# Altium PCB QuadSerial.PcbDoc
Units mil, origin at the board's own origin, x right, y up, seen from the top; angles counter-clockwise.
Board outline 6000 x 4000 mil, 2 copper layers (Top Layer, Bottom Layer); 10 components, 10 nets, 107 pads, 0 vias.
Unrouted connection lines stored in the file: 34.
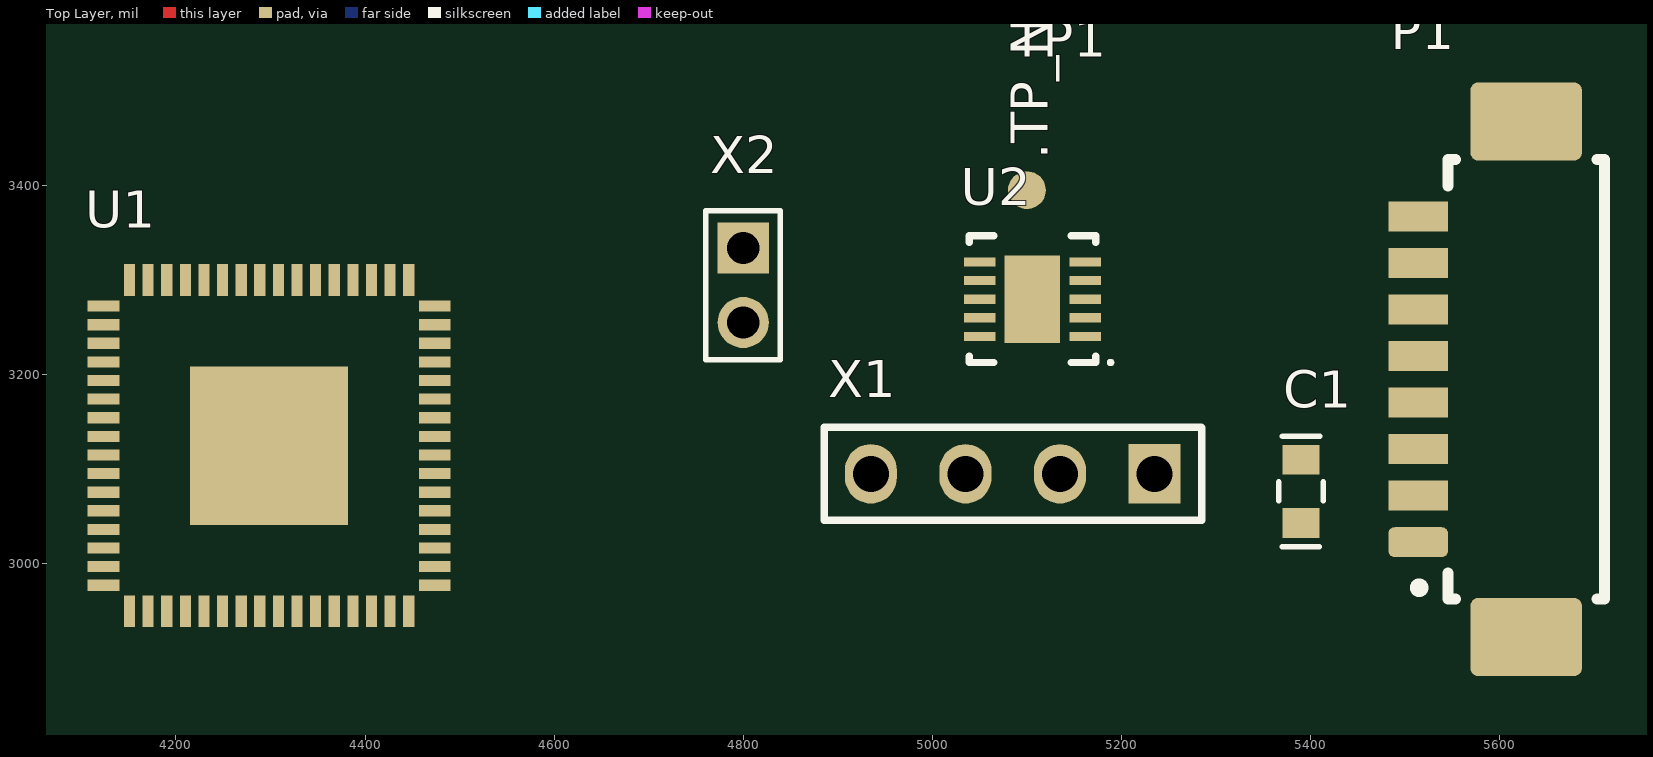
[diagram p0: Top Layer view]
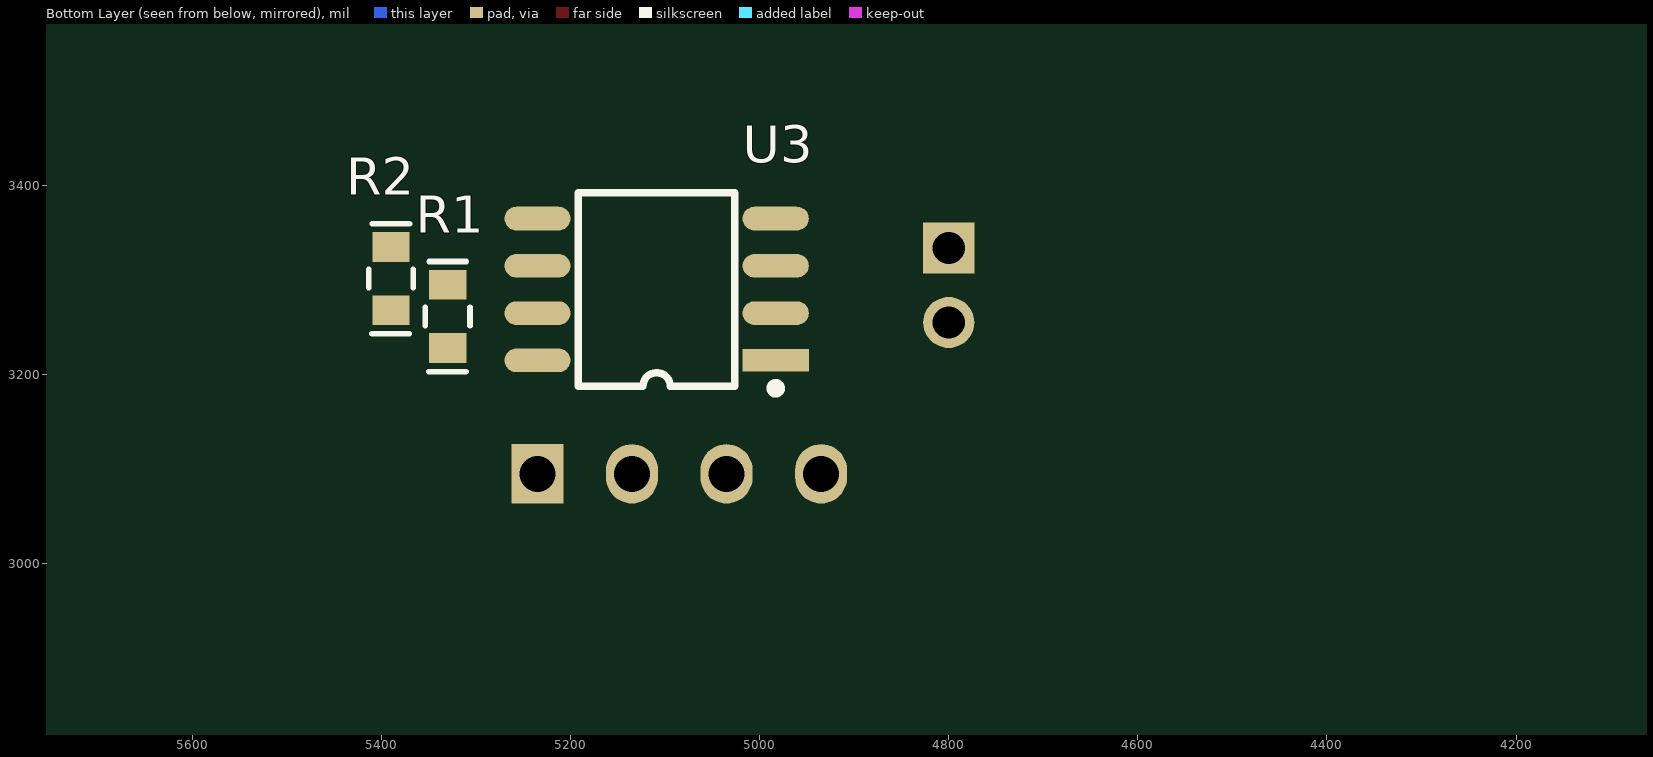
[diagram p1: Bottom Layer view, seen from below]

## Layer stack, top to bottom
Top Solder: solder mask 0.4, Solder Resist, Dk 3.5
Top Layer: signal copper 1.4
Dielectric 1: dielectric 12.6, FR-4, Dk 4.8
Bottom Layer: signal copper 1.4
Bottom Solder: solder mask 0.4, Solder Resist, Dk 3.5

## Board outline
1000,1000 7000,1000 7000,5000 1000,5000

## Design rules (kind name [scope] priority, off if disabled: settings)
Clearance [All] p1: gap=10 ignorepadtopadclearanceinfootprint=FALSE
PolygonConnect [All] p1: connectstyle=Relief reliefconductorwidth=10 reliefentries=4 polygonreliefangle="90 Angle" airgapwidth=10
RoutingVias [All] p1: holewidth=28 width=50 viastyle="Through Hole" minholewidth=28 minwidth=50 maxholewidth=28 maxwidth=50
SolderMaskExpansion [All] p1: expansion=4 istentingtop=FALSE
SupplyNets "Schematic Supply Nets_1" [InNet('GND')] p1: voltage=0.000
SupplyNets "Schematic Supply Nets" [InNet('3v3')] p2: voltage=0.000
Width [All] p1: maxlimit=10 minlimit=10 preferedwidth=10
30 further rules are at their usual default settings.

## Classes and differential pairs
component class IO_driver: C1 P1 R1 R2 TP1 U2 U3 X1 X2
component class main: U1

## Components (designator, comment, footprint, x,y, rotation, side; value= is the part's Value field where it differs from the comment)
C1 "K10-79" SMD_C0603 5390,3043.07 r90 top value=0,1мкФ
P1 "PicoBlade_53261-0871" 53261-0871 5570,3195 r90 top
R1 "OSM R1-8" SMD_0603 5330,3228.07 r90 bottom value=1k
R2 "OSM R1-8" SMD_0603 5390,3268.07 r90 bottom value=1k
TP1 "..." TP_PAD_1 5100,3395 r90 top
U1 "CP2108" QFN64 4298.58,3124.8 r180 top
U2 "ADM3066EBCPZ" LFCSP-10_3x3 5105.91,3279.69 r180 top
U3 "ADM3490ARZ" SOIC-8 4983.03,3215 r0 bottom
X1 "Header 1X4" PLS-4 5235,3095 r180 top
X2 "Header 2X2" PLD2-2 4800,3333.74 r270 top

## Footprints (in the part's own frame and the unit in brackets; to place one, negate y for a bottom-side part, rotate by r counter-clockwise, add the part's x,y. Pads: shape width x height; smd on the part's side, far side on the other; paste and mask are expansions set on the pad)
53261-0871 [mm]
  rrect40% 0.8x1.6 smd: 1(-4.375,1.425)
  rect 0.8x1.6 smd: 2(-3.125,1.425) 3(-1.875,1.425) 4(-0.625,1.425) 5(0.625,1.425) 6(1.875,1.425) 7(3.125,1.425) 8(4.375,1.425)
  rrect20% 2.1x3 smd: MP1(-6.925,-1.475) MP2(6.925,-1.475)
  silkscreen extent -5.9,-3.57 5.9,1.52, body extent -7.55,-3.31 7.6,1.89, height 3.4
LFCSP-10_3x3 [mm] "LFCSP, 10-Leads, Body 3,00x3,00mm, Pitch 0,50mm, Thermal Pad 2,36x1,49mm, IPC Medium Density"
  rect 0.85x0.25 smd mask+0.05: 1(-1.42,1) 2(-1.42,0.5) 3(-1.42,0) 4(-1.42,-0.5) 5(-1.42,-1) 6(1.42,-1) 7(1.42,-0.5) 8(1.42,0) 9(1.42,0.5) 10(1.42,1)
  rect 1.49x2.36 smd mask+0.05: 11(0,0)
  silkscreen extent -2.15,-1.7 1.7,1.75, body extent -1.57,-1.55 1.57,1.55, height 0.8
PLD2-2 [mil]
  rect 54x54 hole 34: 1(0,0)
  round 54 hole 34: 2(78.74,0)
  silkscreen extent -39,-40 118,39, body extent -51,-40 130,39, height 217
PLS-4 [mm] "2.54mm PIN HEADER R/A"
  rect 1.4x1.6 hole 0.97: 1(0,0)
  oval 1.4x1.6 hole 0.97: 2(2.54,0) 3(5.08,0) 4(7.62,0)
  silkscreen extent -1.27,-1.25 8.87,1.25, body extent -1.25,-1.24 8.91,1.3, height 9.3
QFN64 [mm]
  rect 0.85x0.3 smd: 1(-4.45,3.75) 2(-4.45,3.25) 3(-4.45,2.75) 4(-4.45,2.25) 5(-4.45,1.75) 6(-4.45,1.25) 7(-4.45,0.75) 8(-4.45,0.25) 9(-4.45,-0.25) 10(-4.45,-0.75) 11(-4.45,-1.25) 12(-4.45,-1.75) 13(-4.45,-2.25) 14(-4.45,-2.75) 15(-4.45,-3.25) 16(-4.45,-3.75) 33(4.45,-3.75) 34(4.45,-3.25) 35(4.45,-2.75) 36(4.45,-2.25) 37(4.45,-1.75) 38(4.45,-1.25) 39(4.45,-0.75) 40(4.45,-0.25) 41(4.45,0.25) 42(4.45,0.75) 43(4.45,1.25) 44(4.45,1.75) 45(4.45,2.25) 46(4.45,2.75) 47(4.45,3.25) 48(4.45,3.75)
  rect 0.3x0.85 smd: 17(-3.75,-4.45) 18(-3.25,-4.45) 19(-2.75,-4.45) 20(-2.25,-4.45) 21(-1.75,-4.45) 22(-1.25,-4.45) 23(-0.75,-4.45) 24(-0.25,-4.45) 25(0.25,-4.45) 26(0.75,-4.45) 27(1.25,-4.45) 28(1.75,-4.45) 29(2.25,-4.45) 30(2.75,-4.45) 31(3.25,-4.45) 32(3.75,-4.45) 49(3.75,4.45) 50(3.25,4.45) 51(2.75,4.45) 52(2.25,4.45) 53(1.75,4.45) 54(1.25,4.45) 55(0.75,4.45) 56(0.25,4.45) 57(-0.25,4.45) 58(-0.75,4.45) 59(-1.25,4.45) 60(-1.75,4.45) 61(-2.25,4.45) 62(-2.75,4.45) 63(-3.25,4.45) 64(-3.75,4.45)
  rect 4.25x4.25 smd: 65(0,0)
  body extent -4.5,-4.5 4.5,4.5, height 0.8
SMD_0603 [mm]
  rect 0.8x1 smd: 1(0,0) 2(1.7,0)
  silkscreen extent -0.64,-0.6 2.32,0.6, body extent 0.04,-0.42 1.68,0.43, height 0.43
SMD_C0603 [mm]
  rect 0.8x1 smd: 1(0,0) 2(1.7,0)
  silkscreen extent -0.64,-0.6 2.32,0.6, body extent 0,-0.45 1.7,0.45, height 0.9
SOIC-8 [mil]
  rect 70x23.62 smd: 1(0,0)
  oval 70x25 smd: 2(0,-50) 3(0,-100) 4(0,-150) 5(251.97,-150) 6(251.97,-100) 7(251.97,-50) 8(251.97,0)
  silkscreen extent -5,-177 209,34, body extent 4,-173 248,24, height 69
TP_PAD_1 [mil]
  round 40 smd: 0(0,0)

## Part data
C1: library part Capacitor, "Capacitor", Назначение=SMD-конденсатор, Наименование=К10-79, Напряжение=В, Потребление, Вт=0, Точность=%
P1: "Male Header, Pitch 1.25 mm, 1 x 8 Position, Height 3.4 mm, -40 to 85 degC, RoHS, Tape and Reel", ComponentLink1Description=DataSheet, ComponentLink1URL=http://www.molex.com/pdm_docs/sd/532610671_sd.pdf, Назначение="Male Header, Pitch 1.25 mm, 1 x 8 Position, Height 3.4 mm, -40 to 85 degC, RoHS, Tape and Reel", Наименование=53261-0871, Потребление, Вт=0.0
R1 R2: library part Resistor, "Resistor", Назначение=SMD-резистор, Наименование="ОСМ Р1-12", Потребление, Вт=0,001, Точность=%
TP1: library part TP, TP_Name=..., Назначение="Контроль параметров платы", Наименование="Точка проверки"
U1: library part CP2108-B03-GMR, "The CP2108 is a highly integrated USB to Quad UART Bridge / Controller providing a simple solution for updating RS-232/ / RS-485 designs to USB using a minimum of components and / PCB space"
U2: library part ADM3066E, "3.0 V to 5.5 V, ±12 kV IEC ESD Protected, 500 kbps/50 Mbps RS-485 Transceiver", Назначение="RS-485 Transceiver", Наименование=ADM3066EBCPZ, Потребление, Вт=0,1
U3: library part ADM3490, "3.3 V Slew Rate Limited, Half- and / Full-Duplex, RS-485/RS-422 Transceivers", Назначение="RS-485 Transceiver", Наименование=ADM3066EBCPZ, Потребление, Вт=0,1
X1: "Header, 4-Pin, Single row", Назначение="Header, 4-Pin, Single row", Наименование="Header 1X4", Потребление, Вт=0,0
X2: "Header, 2-Pin, Dual row", Назначение="Header, 2-Pin, Dual row", Наименование="Header 2X2", Потребление, Вт=0,0

## Nets (pads, with @x,y where several pads share a name; then routed paths per layer and width w, separated by ;. In a path a pad name is that pad's centre, name@x,y a point inside that pad or via, vN(x,y) a via of type N, cw(c..) or ccw(c..) an arc to the next point about the centre after c; other vN are vias at no path point)
3v3: U2.1 U2.10 U3.1
GND: C1.2 P1.3 P1.4 P1.MP1 P1.MP2 U2.6 U2.11 U3.4
NetC1_1: C1.1 P1.1 P1.2
NetP1_5: P1.5 R1.1 U2.8 U3.8 X1.1
NetP1_6: P1.6 R2.1 U2.9 U3.7 X1.2
NetP1_7: P1.7 R1.2 U3.6 X1.3
NetP1_8: P1.8 R2.2 U3.5 X1.4
NetTP1_0: TP1.0 U1.15 U2.2 U3.2 X2.2
NetU1_16: U1.16 U2.5 U3.3 X2.1
NetU1_18: U1.18 U2.3 U2.4
pads on no net: U1.1 U1.2 U1.3 U1.4 U1.5 U1.6 U1.7 U1.8 U1.9 U1.10 U1.11 U1.12 U1.13 U1.14 U1.17 U1.19 U1.20 U1.21 U1.22 U1.23 U1.24 U1.25 U1.26 U1.27 U1.28 U1.29 U1.30 U1.31 U1.32 U1.33 U1.34 U1.35 U1.36 U1.37 U1.38 U1.39 U1.40 U1.41 U1.42 U1.43 U1.44 U1.45 U1.46 U1.47 U1.48 U1.49 U1.50 U1.51 U1.52 U1.53 U1.54 U1.55 U1.56 U1.57 U1.58 U1.59 U1.60 U1.61 U1.62 U1.63 U1.64 U1.65 U2.7